# Altium PCB BlueFlower POT.PcbDoc
Units mil, origin at the board's own origin, x right, y up, seen from the top; angles counter-clockwise.
Board outline 2702.62 x 1210.82 mil, 2 copper layers (Top Layer, Bottom Layer), stack 26.422 mil thick; 33 components, 49 nets, 119 pads, 161 vias.
Unrouted connection lines stored in the file: 1.
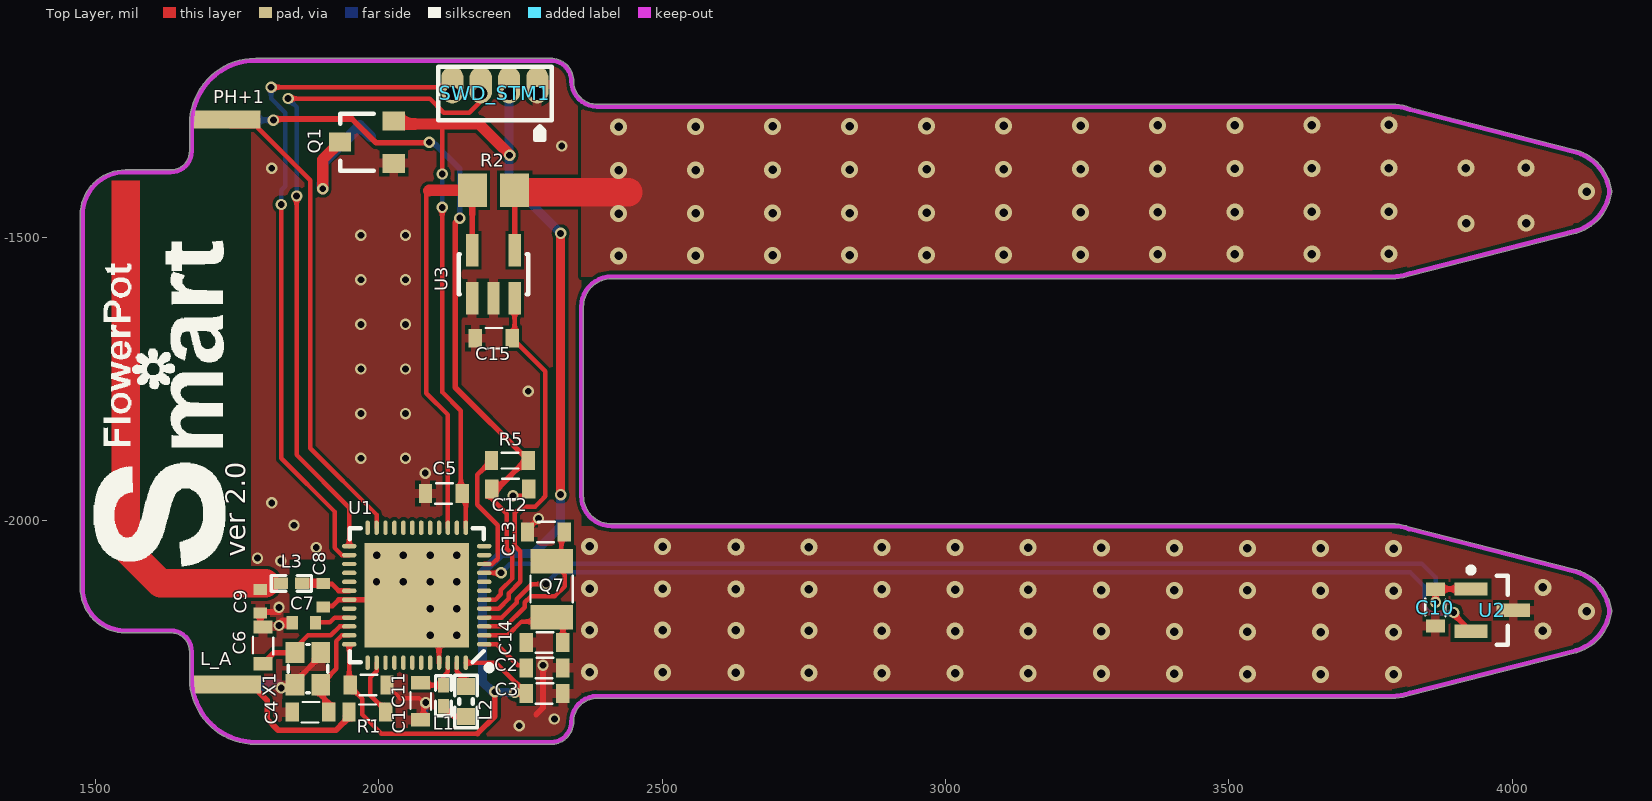
[diagram p0: Top Layer view]
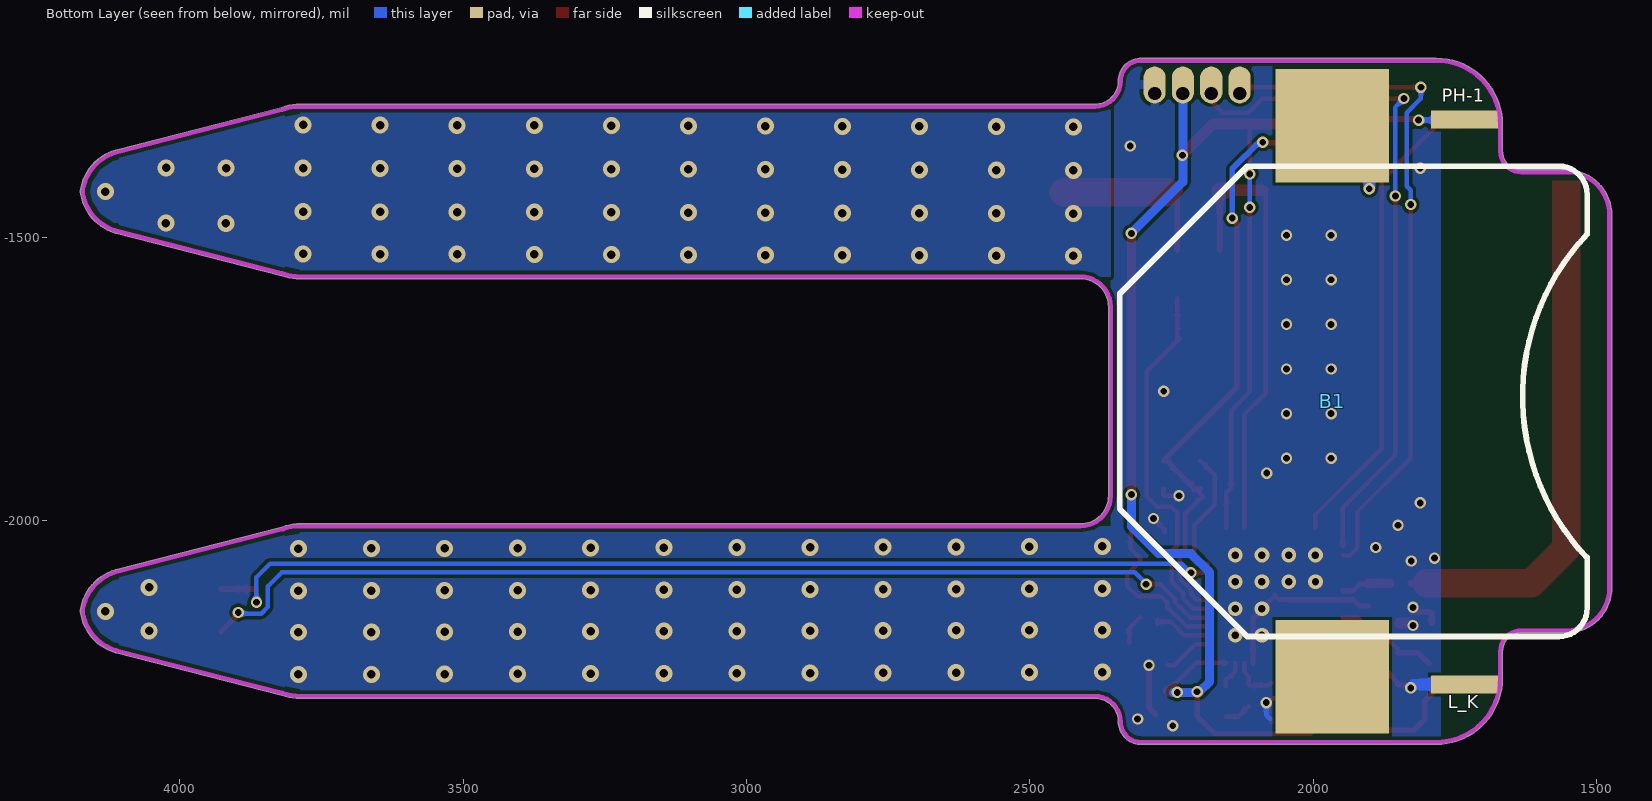
[diagram p1: Bottom Layer view, seen from below]
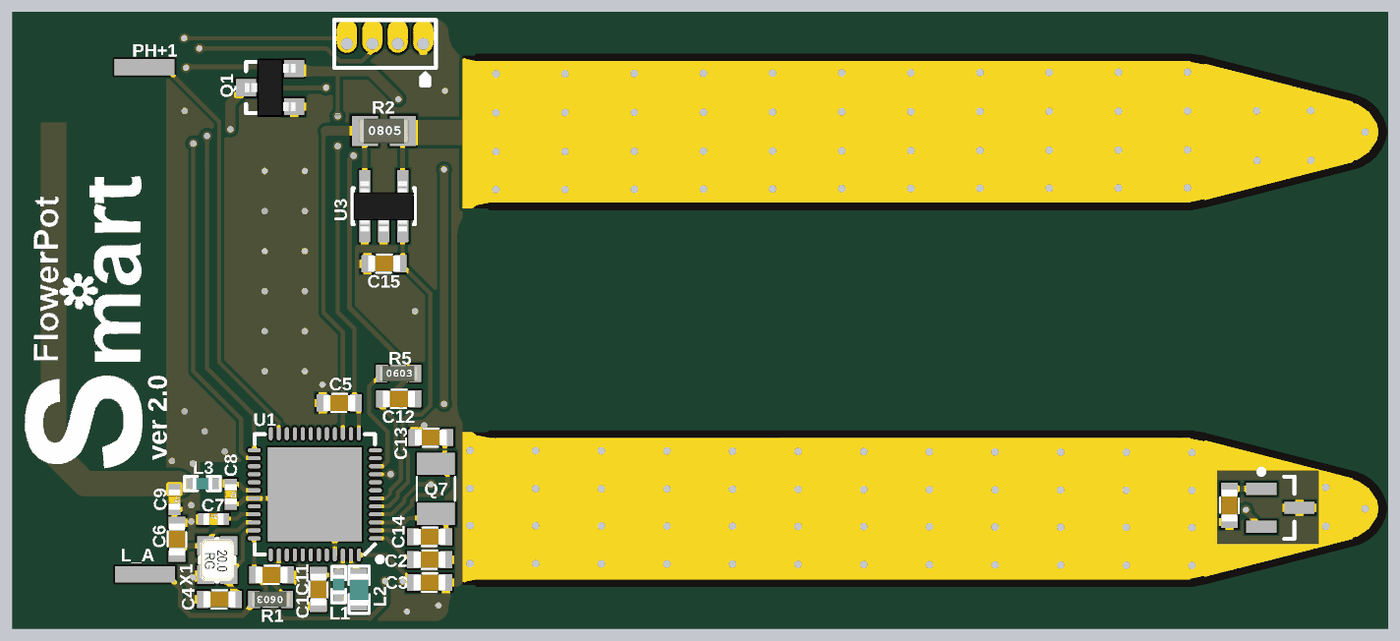
[diagram p2: 3D render of the assembled board from above, using the file's embedded part models]

## Layer stack, top to bottom
Top Solder: solder mask 0.4, Solder Resist, Dk 3.5
Top Layer: signal copper 1.4
Dielectric1: core 23.622, FR-4, Dk 4.54
Bottom Layer: signal copper 1.4
Bottom Solder: solder mask 0.4, Solder Resist, Dk 3.5

## Board outline
1666.05,-2277.83 ccw(c1783,-2277.83) 1783,-2394.78 2303.91,-2394.78 ccw(c2303.91,-2354.74) 2343.95,-2354.74 cw(c2385.09,-2354.74) 2385.09,-2313.6 3793.13,-2313.6 ccw(c3793.13,-2309.64) 3794.46,-2313.37 ccw(c3787.75,-2215.92) 3820.52,-2307.94 4112.26,-2233.14 ccw(c4112.45,-2229.2) 4113.54,-2232.99 ccw(c4089.47,-2149.3) 4175.87,-2160.23 ccw(c4171.95,-2159.74) 4175.91,-2159.74 ccw(c4171.95,-2159.74) 4175.9,-2159.64 ccw(c4171.95,-2159.55) 4175.91,-2159.55 ccw(c4171.95,-2159.55) 4175.79,-2158.62 ccw(c4089.47,-2170.17) 4113.59,-2086.49 ccw(c4089.47,-2170.17) 4113.54,-2086.48 ccw(c4112.45,-2090.27) 4113.43,-2086.44 3820.5,-2011.34 ccw(c3787.75,-2103.37) 3794.46,-2005.92 ccw(c3793.13,-2009.64) 3793.13,-2005.69 3753.66,-2005.69 ccw(c3752.95,-2009.64) 3752.95,-2005.63 2410.91,-2005.63 ccw(c2410.91,-2009.64) 2410.37,-2005.67 cw(c2410.91,-1956) 2361.24,-1956 2361.24,-1622.72 cw(c2410.91,-1622.72) 2410.22,-1573.05 ccw(c2410.91,-1569.09) 2410.91,-1573.11 3752.95,-1573.11 ccw(c3752.95,-1569.09) 3753.66,-1573.05 3793.13,-1573.05 ccw(c3793.13,-1569.09) 3794.46,-1572.82 ccw(c3787.75,-1475.37) 3820.51,-1567.39 4112.26,-1492.59 ccw(c4112.45,-1488.65) 4113.54,-1492.44 ccw(c4089.47,-1408.75) 4175.87,-1419.68 ccw(c4171.95,-1419.18) 4175.91,-1419.18 ccw(c4171.95,-1419.18) 4175.9,-1419.09 ccw(c4171.95,-1419) 4175.91,-1419 ccw(c4171.95,-1419) 4175.79,-1418.07 ccw(c4089.47,-1429.62) 4113.57,-1345.93 ccw(c4089.47,-1429.62) 4113.54,-1345.93 ccw(c4112.45,-1349.72) 4113.43,-1345.89 3820.5,-1270.8 ccw(c3787.75,-1362.82) 3794.45,-1265.37 ccw(c3793.13,-1269.09) 3793.13,-1265.14 3753.66,-1265.14 ccw(c3752.95,-1269.09) 3752.95,-1265.08 2468,-1265.08 ccw(c2468,-1269.09) 2467.29,-1265.14 2385.09,-1265.14 cw(c2385.09,-1224) 2343.95,-1224 ccw(c2303.91,-1224) 2303.91,-1183.96 1783,-1183.96 ccw(c1783,-1300.91) 1666.05,-1300.91 1666.05,-1348 cw(c1633.16,-1348) 1633.16,-1380.89 1552.76,-1380.89 ccw(c1552.76,-1460.35) 1473.3,-1460.09 ccw(c1477.24,-1460.35) 1473.29,-1460.35 1473.29,-2118.39 ccw(c1477.24,-2118.39) 1473.3,-2118.65 ccw(c1552.76,-2118.39) 1552.76,-2197.85 1633.16,-2197.85 cw(c1633.16,-2230.74) 1666.05,-2230.74

## Design rules (kind name [scope] priority, off if disabled: settings)
Clearance [All] p1: gap=6 ignorepadtopadclearanceinfootprint=FALSE except(0: Arc-Hole Track-Hole SMDPad-Hole THPad-Hole Via-Hole Fill-Hole Poly-Hole Region-Hole Text-Hole)
MinimumSolderMaskSliver [All] p1: minsoldermaskwidth=0.01
PolygonConnect PolygonConnect_1 [isVia] p1: connectstyle=Direct reliefconductorwidth=10 reliefentries=4 polygonreliefangle="90 Angle" airgapwidth=10
PolygonConnect PolygonConnect_2 [isPad AND not isVia] p2: connectstyle=Relief reliefconductorwidth=16 reliefentries=4 polygonreliefangle="90 Angle" airgapwidth=6
PolygonConnect [All] p3: connectstyle=Direct reliefconductorwidth=20 reliefentries=4 polygonreliefangle="45 Angle" airgapwidth=6
RoutingVias [All] p1: holewidth=10 width=20 viastyle="Through Hole" minholewidth=10 minwidth=20 maxholewidth=10 maxwidth=20
SilkToSilkClearance [All] p1: silktosilkclearance=0.01
SilkToSolderMaskClearance [IsPad] p1: minsilkscreentomaskgap=0.01 clearancetoexposedcopper=TRUE
SolderMaskExpansion [All] p1: expansion=4
Width [All] p1: maxlimit=100 minlimit=8 preferedwidth=10 minimp=50.000000 maximp=50.000000 favimp=50.000000
27 further rules are at their usual default settings.

## Classes and differential pairs
component class nRF52: C1 C2 C3 C4 C5 C6 C7 C8 C9 C11 L1 L2 L3 L? U1 X1
component class "BlueFlower POT": B1 C10 C12 C13 C14 C15 L_A L_K PH+1 PH-1 Q1 Q7 R1 R2 R5 SWD_STM1 U2 U3

## Components (designator, comment, footprint, x,y, rotation, side; value= is the part's Value field where it differs from the comment)
B1 "BC-2001" CR2032_HOLDER_SMD 1966.54,-1274.37 r270 bottom
C1 "0603 1uF 10V" 0603C-GENERIC 2074,-2318.48 r270 top
C2 "0603 100nF 10V" 0603C-GENERIC 2292.51,-2260 r0 top
C3 "0603 4.7uF 10V" 0603C-GENERIC 2292.51,-2305 r0 top
C4 "0603 12pF 10V" 0603C-GENERIC 1879.51,-2338 r0 top
C5 "0603 100nF 10V" 0603C-GENERIC 2115,-1952 r180 top
C6 "0603 12pF 10V" 0603C-GENERIC 1796,-2220 r270 top
C7 "0402 100pF 10V" "SMD 0402 - CAPACITOR" 1867.91,-2180.42 r0 top
C8 "0402 0.8pF 10V" "SMD 0402 - CAPACITOR" 1901.91,-2131.42 r270 top
C9 "0402 x 10V" "SMD 0402 - CAPACITOR" 1791,-2142 r270 top
C10 "0603 100nF 20V" "SMD 0603S - CAPACITOR" 3864.84,-2153.35 r270 top
C11 "0603 100nF 10V" 0603C-GENERIC 1982,-2290 r0 top
C12 "0603 100nF 20V" "SMD 0603S - CAPACITOR" 2232,-1944 r180 top
C13 "0603 12pF 20V" "SMD 0603S - CAPACITOR" 2295,-2020 r180 top
C14 "0603 12pF 20V" "SMD 0603S - CAPACITOR" 2292.52,-2215 r180 top
C15 "0603 100nF 20V" "SMD 0603S - CAPACITOR" 2203,-1678 r0 top
L1 "HK100515NJ-T" INDC1005X04L 2114,-2309 r270 top
L2 "LBMF1608T100K" INDC1608X06L 2154,-2319 r90 top
L3 "LQP15MN3N9B02D" INDC1005X04L 1845.91,-2110.42 r180 top
L_A "Pad lutowniczy" PAD_3x0.8mm 1733,-2289 r180 top
L_K "Pad lutowniczy" PAD_3x0.8mm 1733,-2289 r0 bottom
PH+1 "Pad lutowniczy" PAD_3x0.8mm 1732,-1292 r180 top
PH-1 "Pad lutowniczy" PAD_3x0.8mm 1733,-1292 r0 bottom
Q1 "BSS84" SOT-23A 1979,-1332 r90 top
Q7 "LFXTAL009678" "Kwarc SMD 3.2 na 1.5mm" 2305,-2071.57 r270 top
R1 "0603 10k 1% 0.25W" "SMD 0603" 1980,-2338 r0 top
R2 "0805 100R 0.1% 0.25W" "SMD 0805" 2202.6,-1417 r180 top
R5 "0603 270k 1% 0.25W" "SMD 0603" 2231.52,-1894 r180 top
SWD_STM1 "HDR1X4" HDR1x4_1.27mm 2205,-1246 r180 top
U1 "nRF52832-QFAA" QFN40P600X600X90-48N 2067.01,-2131.54 r180 top locked
U2 "MCP9700AT-E/TT" SOT-23-TT3_N 3965,-2158 r0 top
U3 "TS1100-50EG5T" SOT-23 2202.4,-1565.32 r90 top
X1 "Q22FA1280034112 lub 774-402F16011CAT" BT-XTAL_2016 1875,-2261 r270 top

## Footprints (in the part's own frame and the unit in brackets; to place one, negate y for a bottom-side part, rotate by r counter-clockwise, add the part's x,y. Pads: shape width x height; smd on the part's side, far side on the other; paste and mask are expansions set on the pad)
0603C-GENERIC [mm]
  rect 0.6x0.85 smd: 1(-0.825,0) 2(0.825,0)
  silkscreen extent -0.39,-0.46 0.39,0.46, body extent -0.8,-0.4 0.8,0.4, height 0.9
BT-XTAL_2016 [mm]
  rect 0.95x0.85 smd: 1(-0.725,-0.575) 2(0.725,-0.575) 3(0.725,0.575) 4(-0.725,0.575)
  silkscreen extent -1.08,-0.88 1.08,0.88, body extent -1.05,-0.85 1.05,0.85, height 0.56
CR2032_HOLDER_SMD [mm]
  rect 5.08x5.08 smd: 1(0.731,0) 1(25.431,0)
  round 18 on Bottom Solder paste+0: 2(13.081,0)
  silkscreen extent 2.54,-9.53 23.62,11.43, body extent -2.29,-10.27 28.45,9.78, height 3.96
HDR1x4_1.27mm [mm]
  oval 1x1.651 hole 0.6 copper offset 0,-0.381: 1(-1.905,0) 2(-0.635,0) 3(0.635,0) 4(1.905,0)
  silkscreen extent -2.54,-1.19 2.54,1.19
INDC1005X04L [mm] "Chip Inductor, 2-Leads, Body 1.0x0.5mm, IPC High Density"
  rect 0.65x0.5 smd: 1(-0.475,0) 2(0.475,0)
  silkscreen extent -0.9,-0.35 0.9,0.35, body extent -0.5,-0.3 0.5,0.3, height 0.5
INDC1608X06L [mm]
  rect 0.75x0.8 smd: 1(-0.675,0) 2(0.675,0)
  silkscreen extent -1.17,-0.5 1.18,0.5, body extent -0.8,-0.48 0.8,0.47, height 0.8
"Kwarc SMD 3.2 na 1.5mm" [mm] "LFXTAL009678"
  rect 1.1x1.9 smd: 1(0,0) 2(2.5,0)
  silkscreen extent 0.65,-0.95 1.85,0.95, body extent -0.27,-0.95 2.78,0.95, height 0.9
PAD_3x0.8mm [mm] "Pad 3x0.8mm"
  rect 3x0.8 smd: 1(0,0)
QFN40P600X600X90-48N [mm]
  oval 0.65x0.2 smd: 1(-3.025,2.2) 2(-3.025,1.8) 3(-3.025,1.4) 4(-3.025,1) 5(-3.025,0.6) 6(-3.025,0.2) 7(-3.025,-0.2) 8(-3.025,-0.6) 9(-3.025,-1) 10(-3.025,-1.4) 11(-3.025,-1.8) 12(-3.025,-2.2) 25(3.025,-2.2) 26(3.025,-1.8) 27(3.025,-1.4) 28(3.025,-1) 29(3.025,-0.6) 30(3.025,-0.2) 31(3.025,0.2) 32(3.025,0.6) 33(3.025,1) 34(3.025,1.4) 35(3.025,1.8) 36(3.025,2.2)
  oval 0.2x0.65 smd: 13(-2.2,-3.025) 14(-1.8,-3.025) 15(-1.4,-3.025) 16(-1,-3.025) 17(-0.6,-3.025) 18(-0.2,-3.025) 19(0.2,-3.025) 20(0.6,-3.025) 21(1,-3.025) 22(1.4,-3.025) 23(1.8,-3.025) 24(2.2,-3.025) 37(2.2,3.025) 38(1.8,3.025) 39(1.4,3.025) 40(1,3.025) 41(0.6,3.025) 42(0.2,3.025) 43(-0.2,3.025) 44(-0.6,3.025) 45(-1,3.025) 46(-1.4,3.025) 47(-1.8,3.025) 48(-2.2,3.025)
  rect 4.7x4.7 smd: 49(0,0)
  silkscreen extent -3.37,-3 3,3.37, body extent -3,-3 3,3, height 0.9
"SMD 0402 - CAPACITOR" [mm]
  rect 0.5x0.6 smd: 1(-0.525,0) 2(0.525,0)
  body extent -0.5,-0.3 0.5,0.3, height 0.2
"SMD 0603" [mm]
  rect 0.6x0.85 smd: 1(-0.825,0) 2(0.825,0)
  silkscreen extent -0.37,-0.35 0.37,0.35, body extent -1,-0.39 1,0.39, height 0.79
"SMD 0603S - CAPACITOR" [mm]
  rect 0.6x0.85 smd: 1(-0.825,0) 2(0.825,0)
  silkscreen extent -0.39,-0.46 0.39,0.46, body extent -0.8,-0.4 0.8,0.4, height 0.9
"SMD 0805" [mm]
  rect 1.3x1.5 smd: 1(-0.95,0) 2(0.95,0)
  body extent -1.25,-0.62 1.25,0.62, height 0.79
SOT-23 [mm]
  rect 1.45x0.55 smd: 1(-1.075,0.95) 2(-1.075,0) 3(-1.075,-0.95) 4(1.075,-0.95) 5(1.075,0.95)
  silkscreen extent -0.9,-1.55 0.9,1.55, body extent -1.25,-1.5 1.25,1.5, height 1.05
SOT-23-TT3_N [mm] "SOT23, 3-Leads, Body 2.9x1.3mm, Pitch 0.95mm, Lead Span 2.4mm, IPC Medium Density"
  rect 1.5x0.6 smd: 1(-0.95,0.95) 2(-0.95,-0.95) 3(0.95,0)
  silkscreen extent -1.07,-1.55 0.7,1.92, body extent -0.7,-1.52 0.7,1.53, height 1.12
SOT-23A [mm]
  rect 0.85x1 smd: 1(-0.95,-1.2) 2(0.95,-1.2) 3(0,1.2)
  silkscreen extent -1.27,-0.3 1.28,1.2, body extent -1.46,-1.27 1.46,1.27, height 0.95

## Part data
B1: "Bat Holder CR2032 SMD"
C1 C2 C3 C4 C5 C6 C7 C8 C9 C10 C11 C12 C13 C14 C15: library part "Kondensator SMD", "Kondensator"
L1: library part L0402-15n, "D³awik 15nH"
L2: library part L0603-10µ, "D³awik 10uH"
L3: library part L0402-3n9, "D³awik 3,9nH"
L_A L_K PH+1 PH-1: library part Pad
Q1: "Tranzystor MOSFET kana³ P"
Q7: "Kwarc 32kHz SMD"
R1 R2 R5: library part "Rezystor SMD", "Rezystor"
SWD_STM1: "Pin header 1x4"
U1: "Multi-protocol Bluetooth Low Energy and 2.4GHz proprietary system-on-chip"
U2: "Czujnik Temperatury"
U3: library part TS1100, "Low-power current sense"
X1: library part XTAL_SMD2016_32MHz_8pF_Epson, "Kwarc 32MHz"

## Via types
v1: diameter 30, hole 15, Top Layer to Bottom Layer, tented both sides, 100 vias
v2: diameter 20, hole 12, Top Layer to Bottom Layer, tented both sides, 49 vias
v3: diameter 25.98, hole 12.99, Top Layer to Bottom Layer, tented both sides, 12 vias

## Nets (pads, with @x,y where several pads share a name; then routed paths per layer and width w, separated by ;. In a path a pad name is that pad's centre, name@x,y a point inside that pad or via, vN(x,y) a via of type N, cw(c..) or ccw(c..) an arc to the next point about the centre after c; other vN are vias at no path point)
0.00_32KHZ: C14.1 Q7.2 U1.2 | length 160.9
  Top Layer w8: U1.2 2227.6,-2202.4 2252,-2178 2271,-2178 2275,-2182 Q7.2@2275,-2175 ; Q7.2 2325,-2190 C14.1
0.01_32KHZ: C13.1 Q7.1 U1.3 | length 288.9
  Top Layer w8: U1.3 2223.55,-2186.65 2257.6,-2152.6 2257.6,-2144.2 2268.8,-2133 2311,-2133 2328,-2116 2328,-2094.57 Q7.1 2305,-2066.57 2322.48,-2049.09 C13.1@2322.48,-2020
0.02: U1.4 U2.2 | length 1847.9
  Top Layer w8: U1.4 2217.09,-2170.91 2243.6,-2144.4 2243.6,-2138.41 2270,-2112 v2(2295,-2112) ; v2@3897,-2164.8 v2(3897,-2162)
  Top Layer w10: v2@3897,-2164.8 U2.2
  Bottom Layer w8: v2(2295,-2112) 2294,-2112 2315,-2091 3820,-2091 3845,-2116 3845,-2152.28 3856.72,-2164 3895,-2164 v2(3897,-2162)
0.03: C15.2 U1.5 U3.3 | length 659
  Top Layer w8: U1.5 2211.84,-2155.16 2229.6,-2137.4 2229.6,-2128.4 2250,-2108 2250,-2054.2 2239.8,-2044 2239.8,-1986.2 2251,-1975 2276.17,-1975 2286.29,-1964.88 2286.29,-1964.71 2294,-1957 2294,-1736.51 C15.2@2239.8,-1682.32 ; C15.2 C15.2@2239.8,-1682.32 ; U3.3 C15.2@2239.8,-1682.32
0.04: C12.2 PH-1.1 R5.1 U1.6 | length 1357.7
  Top Layer w8: U1.6 2205.99,-2139.41 2215.6,-2129.8 2215.6,-2122.4 2236,-2102 2236,-2060 2225.8,-2049.8 2225.8,-1987.8 2194.76,-1956.76 2203.51,-1948 C12.2@2207.51,-1944 ; C12.2 C12.2@2201,-1945.49
  Top Layer w10: v2(1814,-1293) 1816,-1291 1953,-1291 1995,-1333 2088,-1333 v2(2089,-1332) ; v2(2143,-1466) 2135,-1474 2135,-1765 R5.1 2259,-1894 2209,-1944 2207.51,-1944 C12.2
  Bottom Layer w10: PH-1.1 1734,-1293 v2(1814,-1293) ; v2(2089,-1332) 2096,-1332 2143,-1379 v2(2143,-1466)
0.05: U1.7
0.06: U1.8
0.07: C10.1 U1.9 U2.1 | length 1825.6
  Top Layer w8: U1.9 2215.84,-2092.16 v2(2216,-2092) ; v2(3865,-2144) 3865,-2142 3864.84,-2141.84 C10.1 C10.1@3865.12,-2120.6
  Top Layer w10: C10.1@3865.12,-2120.6 U2.1
  Bottom Layer w8: v2(2216,-2092) 2232,-2076 3841,-2076 3865,-2100 v2(3865,-2144)
0.08: R5.2 U1.10 | length 226.1
  Top Layer w8: U1.10 2200.58,-2076.42 2210,-2067 2210,-2008 2174,-1972 2174,-1919.03 R5.2
0.09/NFC1: U1.11
0.10/NFC2: U1.12
0.11: U1.14
0.12: R2.2 U1.15 U3.5 | length 804.8
  Top Layer w8: 2088.5,-1417.5 2084,-1422 2084,-1775 2122.13,-1813.13 U1.15
  Top Layer w10: U3.5 R2.2@2165,-1417.2
  Top Layer w20: 2088.5,-1417.5 2089,-1417 R2.2 R2.2@2165,-1417.2
  Top Layer w30: R2.2@2155.8,-1417.2 R2.2@2165,-1417.2
0.13: U1.16
0.14: U1.17
0.15: U1.18
0.16: U1.19
0.17: U1.20
0.18: U1.21
0.19: U1.22
0.20: PH+1.1 U1.23 | length 842.3
  Top Layer w8: PH+1.1@1738,-1304 1784,-1304 1879,-1399 1879,-1872 1996.14,-1989.14 U1.23
0.21: U1.24
0.22: U1.27
0.23: U1.28
0.24: U1.29
0.25: U1.37
0.26: R1.2 U1.38 | length 103.4
  Top Layer w8: U1.38 1996.14,-2265.66 1985,-2276.8 1985,-2308 2012.49,-2335.49 R1.2
0.27: U1.39
0.28: U1.40
0.29: U1.41
0.30: U1.42
0.31: U1.43
3V3: C3.1 C5.1 C11.1 Q1.2 SWD_STM1.2 U1.13 U1.36 U1.48 | length 2800.9
  Top Layer w8: C11.1@1947.52,-2290 1947.52,-2290.52 1971,-2314 1971,-2342 2004.61,-2375.61 2174.39,-2375.61 ; C11.1@1947.91,-2286.75 1947.91,-2276.94 U1.36 ; v2(2112,-1447) 2112,-1773 2145,-1806 2145,-1941.76 2153.62,-1950.38 U1.13 ; v2(2112,-1388) 2112,-1301 2113,-1300 ; U1.48 2206.63,-2250.63 2256,-2300 C3.1@2257.52,-2300
  Top Layer w10: 2174.39,-2375.61 2205,-2345 v2(2205,-2302)
  Top Layer w16: v2(2240,-2303) 2254.52,-2303 C3.1@2257.52,-2300 ; v2(2321,-1954) v2(2321,-1493)
  Top Layer w20: Q1.2 2031.64,-1300 2113,-1300 2177,-1300 2231,-1354 v2(2231,-1355)
  Bottom Layer w8: v2(2112,-1447) v2(2112,-1388)
  Bottom Layer w10: v2@2201,-2302 v2(2205,-2302)
  Bottom Layer w16: SWD_STM1.2 2230,-1402 v2(2321,-1493) ; v2(2240,-2303) 2218,-2303 ; v2@2246.31,-2303 2218,-2303 ; v2(2321,-1954) 2321,-2010 2273,-2058 2216.06,-2058 2183,-2091.06 2183,-2284 2201,-2302 2202,-2303 2218,-2303
DEC1: C2.1 U1.1 | length 86.7
  Top Layer w8: U1.1 2208.15,-2218.15 2245,-2255 C2.1@2257.52,-2255
DEC2: U1.32
DEC3: C7.2 U1.33 | length 52.9
  Top Layer w8: 1898.5,-2179.42 1913.91,-2179.42 1922.43,-2170.9 U1.33
DEC4: C1.1 L1.1 U1.46 | length 84.8
  Top Layer w8: C1.1 2078.3,-2290.3 L1.1 2114,-2275 2122.13,-2266.87 U1.46
GND: C1.2 C2.2 C3.2 C4.1 C5.2 C6.1 C7.1 C8.2 C9.2 C10.2 C11.2 C12.1 C13.2 C14.2 C15.1 L_K.1 Q1.1 SWD_STM1.1 U1.31 U1.45 U1.49 U2.3 U3.1 U3.2 X1.2 X1.4 | length 926.5
  Top Layer w8: C11.2@2021,-2278 2019,-2280 2019,-2285.49 C11.2 2037.49,-2313 2071,-2313 2079,-2321 2079,-2345.97 C1.2 ; C1.2@2074,-2355.49 C1.2@2074,-2349.51 ; v2(2237,-1956) 2265,-1956 2264.48,-1955.48 C12.1 C12.1@2263,-1945.48 ; C13.2 2262.51,-2015.49 v2(2282,-1996)
  Top Layer w9: v2(1828,-2295) 1828,-2290.92 1827.04,-2289.96 1851.27,-2289.96 1851.28,-2284.95 1896.55,-2239.68 X1.4@1896.55,-2232.87 ; C8.2@1901.68,-2150.84 1901.91,-2150.84 1917.93,-2150.84 1929.24,-2139.54 1996.14,-2139.54 U1.49@2042.68,-2139.54 ; U1.49@2043.39,-2139.41 2059.13,-2139.41 U1.49 v3(2090.63,-2155.16) 2106.38,-2170.91 2106.38,-2202.4 U1.45
  Top Layer w10: C6.1@1791,-2180.48 C9.2 C9.2@1791,-2161.67 ; C9.2@1796.26,-2161.18 1824.18,-2161.18 1824,-2161 v2(1824,-2153) ; 2278,-2342 2290,-2330 v2(2290,-2255)
  Top Layer w20: v2@1831.4,-2180.42 C7.1
  Bottom Layer w8: 2076.54,-2349.77 2083,-2343.3 v2(2083,-2321)
  Bottom Layer w9: v3@1988.16,-2060.67 v3(1996.14,-2060.67) ; v3(2137.87,-2155.16) v3@2144.13,-2161.42
  Bottom Layer w20: L_K.1 1822,-2289 v2(1828,-2295)
  other v1: 3791.13,-2271.36 3404.13,-2270.29 3533.13,-2270.64 3662.13,-2271 3017.13,-2269.22 3146.13,-2269.58 3275.13,-2269.93 2630.13,-2268.16 2759.13,-2268.51 2888.13,-2268.87 2372.13,-2267.45 2501.13,-2267.8 3533.13,-2196.16 3662.13,-2196.51 3791.13,-2196.87 3275.13,-2195.45 3404.13,-2195.8 2888.13,-2194.38 3017.13,-2194.74 3146.13,-2195.09 4054.45,-2194.36 2501.13,-2193.32 2630.13,-2193.67 2759.13,-2194.03 2372.13,-2192.96 4131.53,-2160 3533.13,-2123.13 3662.13,-2123.49 3791.13,-2123.84 3275.13,-2122.42 3404.13,-2122.78 2888.13,-2121.36 3017.13,-2121.71 3146.13,-2122.07 2501.13,-2120.29 2630.13,-2120.65 2759.13,-2121 2372.13,-2119.94 4054.45,-2117.82 3791.13,-2049.36 3404.13,-2048.29 3533.13,-2048.64 3662.13,-2049 3017.13,-2047.22 3146.13,-2047.58 3275.13,-2047.93 2630.13,-2046.16 2759.13,-2046.51 2888.13,-2046.87 2372.13,-2045.45 2501.13,-2045.8
  other v2: 2248,-2362 2310,-2350 1824,-2185 1827,-2071 1786,-2066 1889.76,-2047.24 1850.39,-2007.87 1811.02,-1968.5 2082,-1916 1968.5,-1889.76 2047.24,-1889.76 1968.5,-1811.02 2047.24,-1811.02 2263.78,-1771.65 1968.5,-1732.28 2047.24,-1732.28 1968.5,-1653.54 2047.24,-1653.54 1968.5,-1574.8 2047.24,-1574.8 1968.5,-1496.06 2047.24,-1496.06 1811.02,-1377.95 2322.83,-1338.58
  other v3: 2090.63,-2202.4 2137.87,-2202.4 1996.14,-2107.91 2043.39,-2107.91 2090.63,-2107.91 2137.87,-2107.91 2043.39,-2060.67 2090.63,-2060.67 2137.87,-2060.67
NetB1_1: B1.1 Q1.3 | length 259.4
  Top Layer w20: v2(1901,-1414) 1901,-1362.76 Q1.3
  Bottom Layer w20: v2(1901,-1414) 1901,-1368.69 1966.54,-1303.15 B1.1@1985.39,-1322
NetC8_1: C8.1 L3.1 U1.30 | length 88.7
  Top Layer w9: C8.1@1901.69,-2111.46 1901.91,-2111.46 1917.02,-2111.47 1929.21,-2123.66 U1.30
  Top Layer w16: L3.1 1901.58,-2110.42 C8.1
NetC9_1: C9.1 L3.2 | length 895.9
  Top Layer w12: L3.2@1826.91,-2111.42 L3.2@1827.21,-2111.42 ; L3.2@1827.31,-2110.51 L3.2@1827.82,-2110.51
  Top Layer w50: 1553.49,-1425.44 1553.49,-2049.12 1614.88,-2110.51 1799.49,-2110.51
NetL1_2: L1.2 L2.1 | length 47.4
  Top Layer w8: L1.2 2131.87,-2345.57 L2.1
NetL2_2: L2.2 U1.47 | length 62.2
  Top Layer w8: L2.2 2154,-2282 2137.87,-2265.87 2137.87,-2264.38 ; 2137.87,-2264.38 U1.47 2137.87,-2264.38
NetL_A_1: L_A.1 R1.1 | length 285.5
  Top Layer w10: L_A.1 1775,-2289 1803,-2317 1803,-2350 1822.73,-2369.73 1924.37,-2369.73 1947.52,-2346.58 R1.1
NRF_SWDCLK: SWD_STM1.3 U1.25 | length 1207.3
  Top Layer w8: v2(1840,-1255) 2090,-1255 2115,-1280 2160,-1280 2180,-1260 SWD_STM1.3 ; v2(1855,-1427) 1855,-1884 1947.91,-1976.91 U1.25
  Bottom Layer w8: v2(1840,-1255) 1855,-1270 v2(1855,-1427)
NRF_SWDIO: SWD_STM1.4 U1.26 | length 1220.7
  Top Layer w8: v2(1810,-1235) 2115,-1235 2126,-1246 SWD_STM1.4 ; v2(1828,-1442) 1828,-1889.8 1922,-1983.8 1922,-2047.58 1935.09,-2060.67 U1.26
  Bottom Layer w8: v2(1810,-1235) 1810,-1255 1835,-1280 1835,-1410 1828,-1417 v2(1828,-1442)
PROBE_SOIL+: R2.1 U3.4 | length 288.9
  Top Layer w10: U3.4 R2.1@2239.8,-1417.2
  Top Layer w20: R2.1@2239.8,-1417.2 R2.1
  Top Layer w50: R2.1@2258,-1420.2 2440.8,-1420.2
  other v1: 2423.11,-1532.56 2559.05,-1532.2 2695,-1531.85 2830.94,-1531.49 2966.89,-1531.14 3102.83,-1530.78 3238.78,-1530.43 3374.72,-1530.07 3510.67,-1529.72 3646.61,-1529.36 3782.56,-1529.01 3919.06,-1475.36 4025,-1475 2423.11,-1458.07 2559.05,-1457.72 2695,-1457.36 2830.94,-1457.01 2966.89,-1456.65 3102.83,-1456.3 3238.78,-1455.94 3374.72,-1455.58 3510.67,-1455.23 3646.61,-1454.87 3782.56,-1454.52 4131.53,-1419.45 2423.11,-1381.54 2559.05,-1381.18 2695,-1380.83 2830.94,-1380.47 2966.89,-1380.12 3102.83,-1379.76 3238.78,-1379.4 3374.72,-1379.05 3510.67,-1378.69 3646.61,-1378.34 3782.56,-1377.98 3918.5,-1377.63 4024.45,-1377.27 2423.11,-1305 2559.05,-1304.65 2695,-1304.29 2830.94,-1303.93 2966.89,-1303.58 3102.83,-1303.22 3238.78,-1302.87 3374.72,-1302.51 3510.67,-1302.16 3646.61,-1301.8 3782.56,-1301.45
XC1: C6.2 U1.34 X1.1 | length 176.4
  Top Layer w8: X1.1@1851.28,-2226.06 1875.1,-2202.23 1915.47,-2202.23 1931.04,-2186.65 U1.34
  Top Layer w10: C6.2 1815.61,-2232.87 X1.1@1851.28,-2232.87
XC2: C4.2 U1.35 X1.3 | length 184.8
  Top Layer w8: X1.3@1907.49,-2297.49 1899.96,-2289.96 X1.3@1896.55,-2289.96 ; C4.2 1912,-2322 1896.55,-2306.55 X1.3@1896.55,-2289.96 ; U1.35 1935.09,-2202.4 1925.12,-2212.38 1925.12,-2261.39 X1.3@1896.55,-2289.96
pads on no net: B1.2 U1.44

## Polygon pours and split planes (outlines as drawn)
no net on Top Solder "Bottom Layer-No Net" (solid): 2357.28,-1269.03 3793.13,-1269.03 3925,-1301.67 4051.45,-1330.4 4091.88,-1344.45 4134.59,-1355.13 4153.62,-1370.72 4169.28,-1394.76 4171.95,-1419 4160,-1449.45 4130,-1479.45 4030.6,-1509.45 3793.13,-1569.16 2357.28,-1569.16
no net on Top Solder "Bottom Layer-No Net" (solid, pour order 17): 2357.28,-2009.58 3793.13,-2009.58 3925,-2042.22 4051.45,-2070.95 4091.88,-2085 4134.59,-2095.68 4153.62,-2111.27 4169.28,-2135.31 4171.95,-2159.55 4160,-2190 4130,-2220 4030.6,-2250 3793.13,-2309.71 2357.28,-2309.71
no net on Bottom Solder "Bottom Layer-No Net" (solid): 2357.28,-1269.03 3793.13,-1269.03 3925,-1301.67 4051.45,-1330.4 4091.88,-1344.45 4134.59,-1355.13 4153.62,-1370.72 4169.28,-1394.76 4171.95,-1419 4160,-1449.45 4130,-1479.45 4030.6,-1509.45 3793.13,-1569.16 2357.28,-1569.16
no net on Bottom Solder "Bottom Layer-No Net" (solid): 2357.28,-2009.58 3793.13,-2009.58 3925,-2042.22 4051.45,-2070.95 4091.88,-2085 4134.59,-2095.68 4153.62,-2111.27 4169.28,-2135.31 4171.95,-2159.55 4160,-2190 4130,-2220 4030.6,-2250 3793.13,-2309.71 2357.28,-2309.71
GND on Top Layer "Top Solder-No Net" (solid, remove dead copper, pour order 30): 1477.24,-2385.83 2357.28,-2385.83 2357.28,-1192.91 1477.24,-1192.91
GND on Top Layer "Bottom Layer-No Net" (solid, remove dead copper, pour order 27): 2357.28,-2009.58 3793.13,-2009.58 3925,-2042.22 4051.45,-2070.95 4091.88,-2085 4134.59,-2095.68 4153.62,-2111.27 4169.28,-2135.31 4171.95,-2159.55 4160,-2190 4130,-2220 4030.6,-2250 3793.13,-2309.71 2357.28,-2309.71
PROBE_SOIL+ on Top Layer "Bottom Layer-No Net" (solid, pour order 25): 2357.28,-1269.03 3793.13,-1269.03 3925,-1301.67 4051.45,-1330.4 4091.88,-1344.45 4134.59,-1355.13 4153.62,-1370.72 4169.28,-1394.76 4171.95,-1419 4160,-1449.45 4130,-1479.45 4030.6,-1509.45 3793.13,-1569.16 2357.28,-1569.16
GND on Bottom Layer "Top Solder-No Net" (solid, remove dead copper, pour order 32): 1477.24,-2385.83 2357.28,-2385.83 2357.28,-1192.91 1477.24,-1192.91
GND on Bottom Layer "Bottom Layer-No Net" (solid, pour order 28): 2357.28,-2009.52 3793.13,-2009.52 3925,-2042.15 4051.45,-2070.89 4091.88,-2084.94 4134.59,-2095.62 4153.62,-2111.2 4169.28,-2135.25 4171.95,-2159.49 4160,-2189.94 4130,-2219.94 4030.6,-2249.94 3793.13,-2309.64 2357.28,-2309.64
PROBE_SOIL+ on Bottom Layer "Bottom Layer-No Net" (solid, pour order 26): 2357.28,-1269.03 3793.13,-1269.03 3925,-1301.67 4051.45,-1330.4 4091.88,-1344.45 4134.59,-1355.13 4153.62,-1370.72 4169.28,-1394.76 4171.95,-1419 4160,-1449.45 4130,-1479.45 4030.6,-1509.45 3793.13,-1569.16 2357.28,-1569.16

## Keep-outs
Keep-Out Layer:
  lines w7.87: 2410.91,-2009.62 cw(c2410.91,-1956) 2357.28,-1956 2357.28,-1622.72 cw(c2410.91,-1622.72) 2410.91,-1569.09 ; 2476,-2309.64 2385.09,-2309.64 ; 2476,-1269.09 2385.09,-1269.09 cw(c2385.09,-1224) 2340,-1224 ccw(c2303.91,-1224) 2303.91,-1187.91 2225,-1187.91 1783,-1187.91 ccw(c1783,-1300.91) 1670,-1300.91 1670,-1348 cw(c1633.16,-1348) 1633.16,-1384.84 1552.76,-1384.84 ccw(c1552.76,-1460.35) 1477.25,-1460.35 1477.24,-2118.39 ccw(c1552.76,-2118.39) 1552.76,-2193.9 1633.16,-2193.9 cw(c1633.16,-2230.74) 1670,-2230.74 1670,-2277.83 ccw(c1783,-2277.83) 1783,-2390.83 2225,-2390.83 2303.91,-2390.83 ccw(c2303.91,-2354.74) 2340,-2354.74 cw(c2385.09,-2354.74) 2385.09,-2309.64 ; 3782.83,-2309.64 3748.03,-2309.64 3788.2,-2309.64 ; 3782.83,-1569.09 3748.03,-1569.09 3788.2,-1569.09 ; 3793.13,-2309.64 3752.95,-2309.64 ; 3793.13,-2009.64 3752.95,-2009.64 3787.75,-2009.64 cw(c3787.75,-2103.37) 3819.81,-2015.3 ; 3793.13,-1569.09 3752.95,-1569.09 3787.75,-1569.09 ccw(c3787.75,-1475.37) 3819.81,-1563.44 ; 3793.13,-1269.09 3752.95,-1269.09 3787.75,-1269.09 cw(c3787.75,-1362.82) 3819.81,-1274.75 ; 3817.91,-2304.52 4112.45,-2229.02 ccw(c4089.47,-2149.12) 4171.95,-2159.55 ; 3817.91,-2014.76 4112.45,-2090.27 cw(c4089.47,-2170.17) 4171.95,-2159.74 cw(c4089.47,-2149.3) 4112.45,-2229.2 ; 3817.91,-1563.97 4112.45,-1488.47 ccw(c4089.47,-1408.57) 4171.95,-1419 ; 3817.91,-1274.21 4112.45,-1349.72 cw(c4089.47,-1429.62) 4171.95,-1419.18 cw(c4089.47,-1408.75) 4112.45,-1488.65 ; 3819.81,-2303.99 cw(c3787.75,-2215.92) 3787.75,-2309.64 3752.95,-2309.64 ; 2385.09,-2309.64 3752.95,-2309.64
  lines w8: 2410.91,-2009.64 3752.95,-2009.64 ; 2410.91,-1569.09 3752.95,-1569.09 ; 2468,-1269.09 3752.95,-1269.09

## Other copper
Top Layer:
  region net NetC9_1: 1578.36,-1399.95 1528.36,-1399.95 1528.36,-1429.95 1578.36,-1429.95
  pour cut-out: 1774.54,-1193 1477,-1193 1477,-2385.91 1774.54,-2385.91
  pour cut-out: 1841.69,-2068.16 1949.69,-2068.16 1949.68,-2182.16 1841.68,-2182.16
Bottom Layer:
  pour cut-out: 1774.79,-1192.91 1477.24,-1192.91 1477.24,-2385.83 1774.79,-2385.83

## Silkscreen, mask and mechanical layers (free items; w line width, h text height)
Top Overlay:
  drawing of 23 lines, arcs and shapes, not listed
  text "ver 2.0" at 1776,-2064 h60 r90
Top Solder:
  pour cut-out: 3841,-2085 4041,-2085 4041,-2230 3841,-2230
  lines w7.87: 2385.09,-2309.64 3752.95,-2309.64 ; 2410.91,-1569.03 3752.95,-1569.03 ; 3782.83,-2309.64 3748.03,-2309.64 3788.2,-2309.64 ; 3782.83,-1569.03 3748.03,-1569.03 3788.2,-1569.03 ; 3787.75,-1269.03 cw(c3787.75,-1362.76) 3819.81,-1274.68 ; 3793.13,-2309.64 3752.95,-2309.64 ; 3793.13,-2009.64 3752.95,-2009.64 3787.75,-2009.64 cw(c3787.75,-2103.37) 3819.81,-2015.3 ; 3793.13,-1569.03 3752.95,-1569.03 ; 3817.91,-2304.52 4112.45,-2229.02 ccw(c4089.47,-2149.12) 4171.95,-2159.55 ; 3817.91,-2014.76 4112.45,-2090.27 cw(c4089.47,-2170.17) 4171.95,-2159.74 cw(c4089.47,-2149.3) 4112.45,-2229.2 ; 3817.91,-1563.91 4112.45,-1488.4 ccw(c4089.47,-1408.5) 4171.95,-1418.94 ; 3817.91,-1274.15 4112.45,-1349.66 cw(c4089.47,-1429.56) 4171.95,-1419.12 cw(c4089.47,-1408.68) 4112.45,-1488.58 ; 3819.81,-2303.99 cw(c3787.75,-2215.92) 3787.75,-2309.64 3752.95,-2309.64 ; 3819.81,-1563.38 cw(c3787.75,-1475.31) 3787.75,-1569.03 3752.95,-1569.03
  lines w8: 2385.09,-1269.09 3787.95,-1269.09 ; 2410.91,-2009.64 3752.95,-2009.64
Bottom Solder:
  pour cut-out: 2358,-2100 3818,-2104 3835,-2121 3835,-2155 3857,-2177 3901,-2177 3916,-2177 3916,-2140.72 3883,-2140.72 3883,-2104.18 3853,-2069 3835,-2069 2358,-2065
  lines w7.87: 2385.09,-2309.64 3752.95,-2310 ; 2410.91,-1569.09 3752.95,-1569.09 ; 3782.83,-2310 3748.03,-2310 3788.2,-2310 ; 3782.83,-1569.09 3748.03,-1569.09 3788.2,-1569.09 ; 3793.13,-2310 3752.95,-2310 ; 3793.13,-2010 3752.95,-2010 3787.75,-2010 cw(c3787.75,-2103.73) 3819.81,-2015.65 ; 3793.13,-1569.09 3752.95,-1569.09 ; 3793.13,-1269.09 3752.95,-1269.09 3787.75,-1269.09 cw(c3787.75,-1362.82) 3819.81,-1274.75 ; 3817.91,-2304.88 4112.45,-2229.37 ccw(c4089.47,-2149.47) 4171.95,-2159.91 ; 3817.91,-2015.12 4112.45,-2090.63 cw(c4089.47,-2170.53) 4171.95,-2160.09 cw(c4089.47,-2149.65) 4112.45,-2229.55 ; 3817.91,-1563.97 4112.45,-1488.46 ccw(c4089.47,-1408.57) 4171.95,-1419 ; 3817.91,-1274.21 4112.45,-1349.72 cw(c4089.47,-1429.62) 4171.95,-1419.18 cw(c4089.47,-1408.75) 4112.45,-1488.65 ; 3819.81,-2304.35 cw(c3787.75,-2216.27) 3787.75,-2310 3752.95,-2310 ; 3819.81,-1563.44 cw(c3787.75,-1475.37) 3787.75,-1569.09 3752.95,-1569.09
  lines w8: 2385.09,-1269.09 3752.95,-1269.09 ; 2410.91,-2010 3752.95,-2010